# Altium PCB IOT.PcbDoc
Units mil, origin at the board's own origin, x right, y up, seen from the top; angles counter-clockwise.
Board outline 3764.27 x 1643.03 mil, 2 copper layers (Top Layer, Bottom Layer); 29 components, 37 nets, 152 pads, 6 vias.
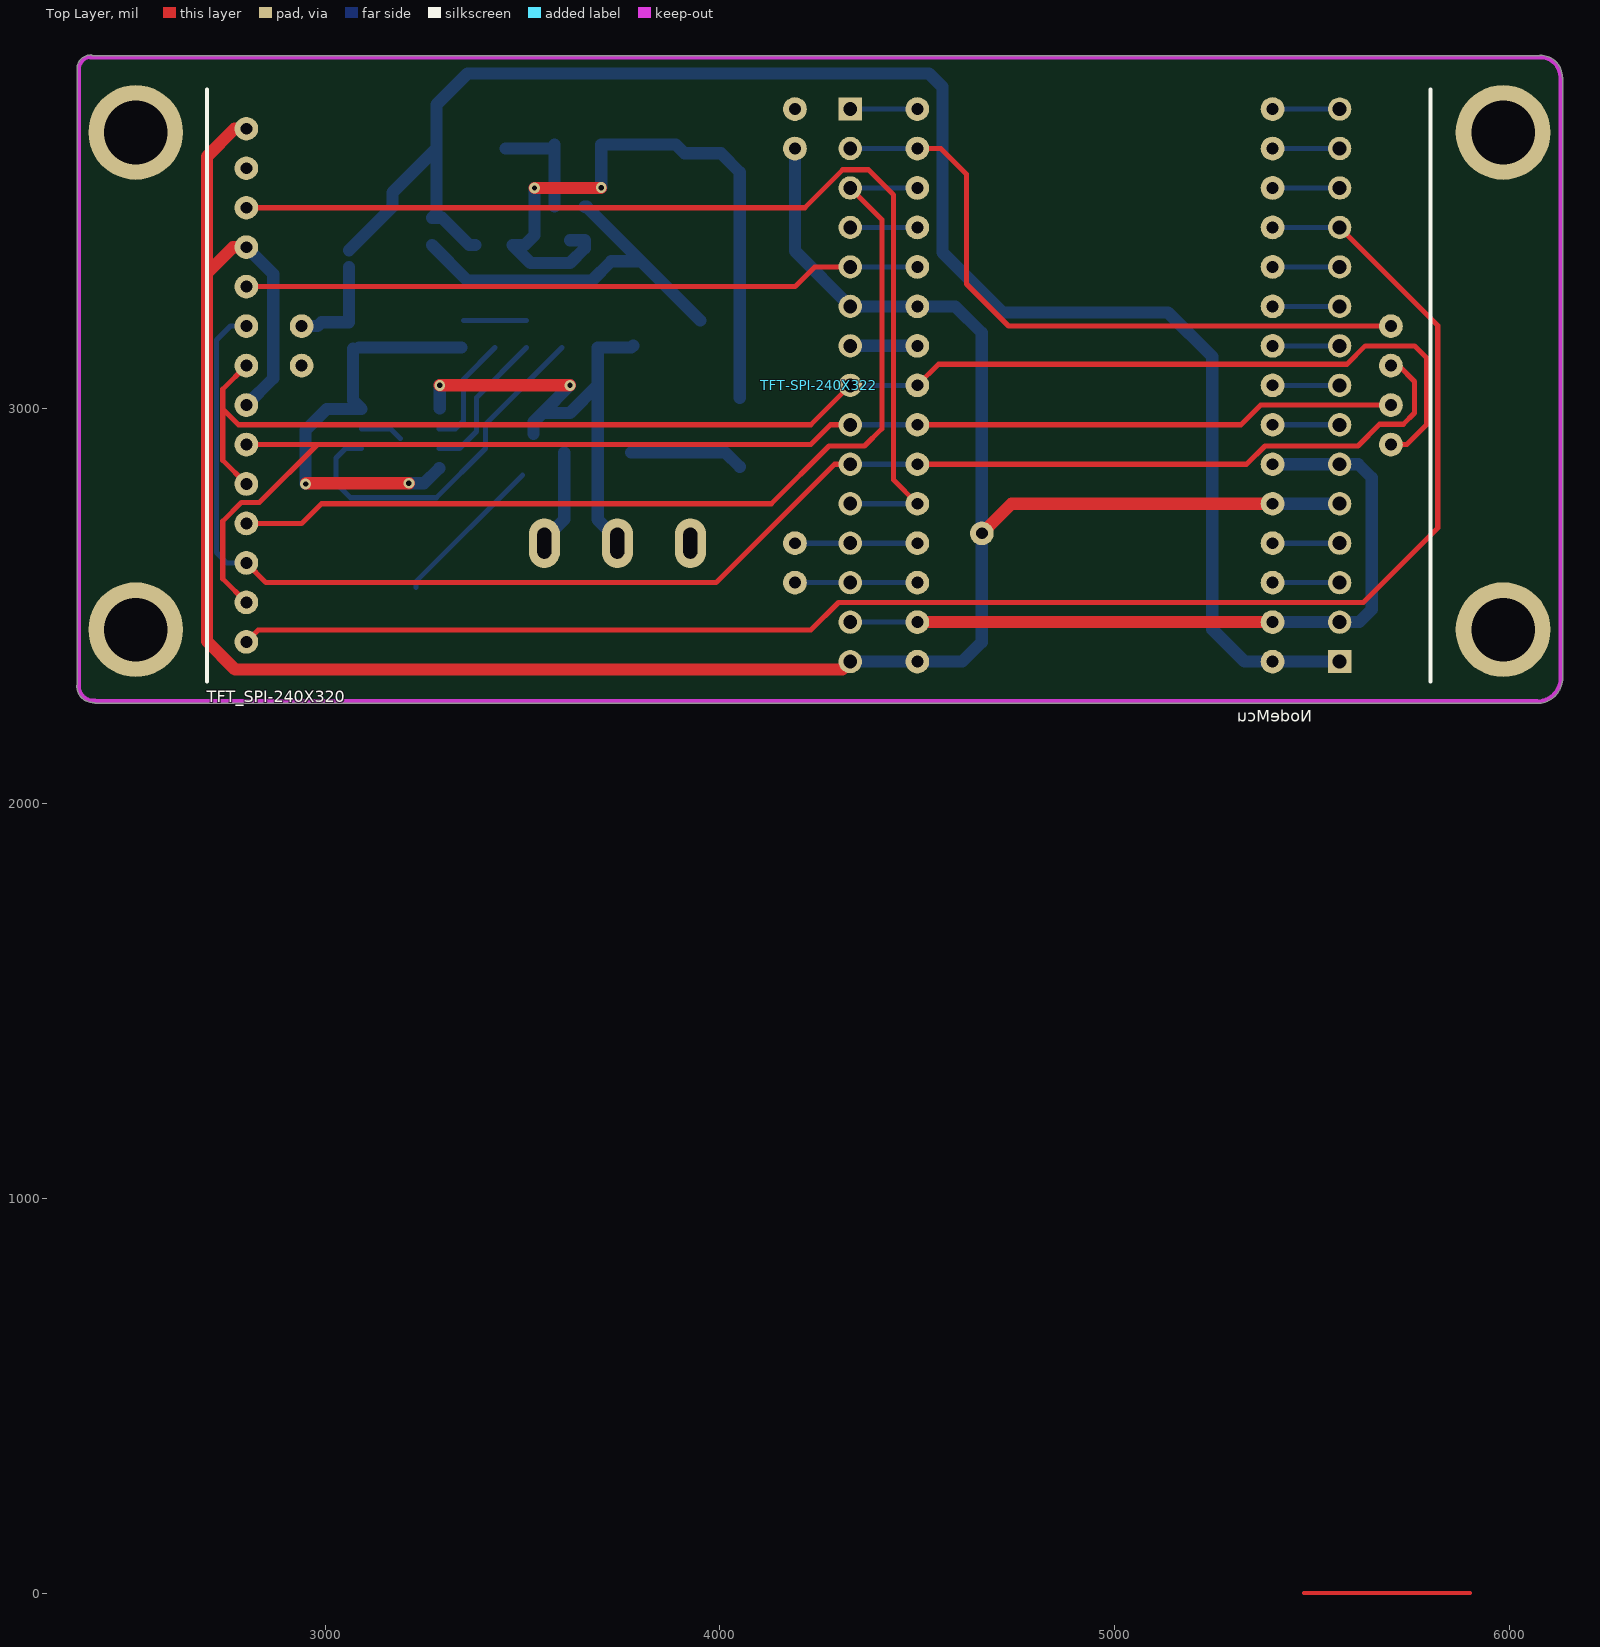
[diagram p0: Top Layer view]
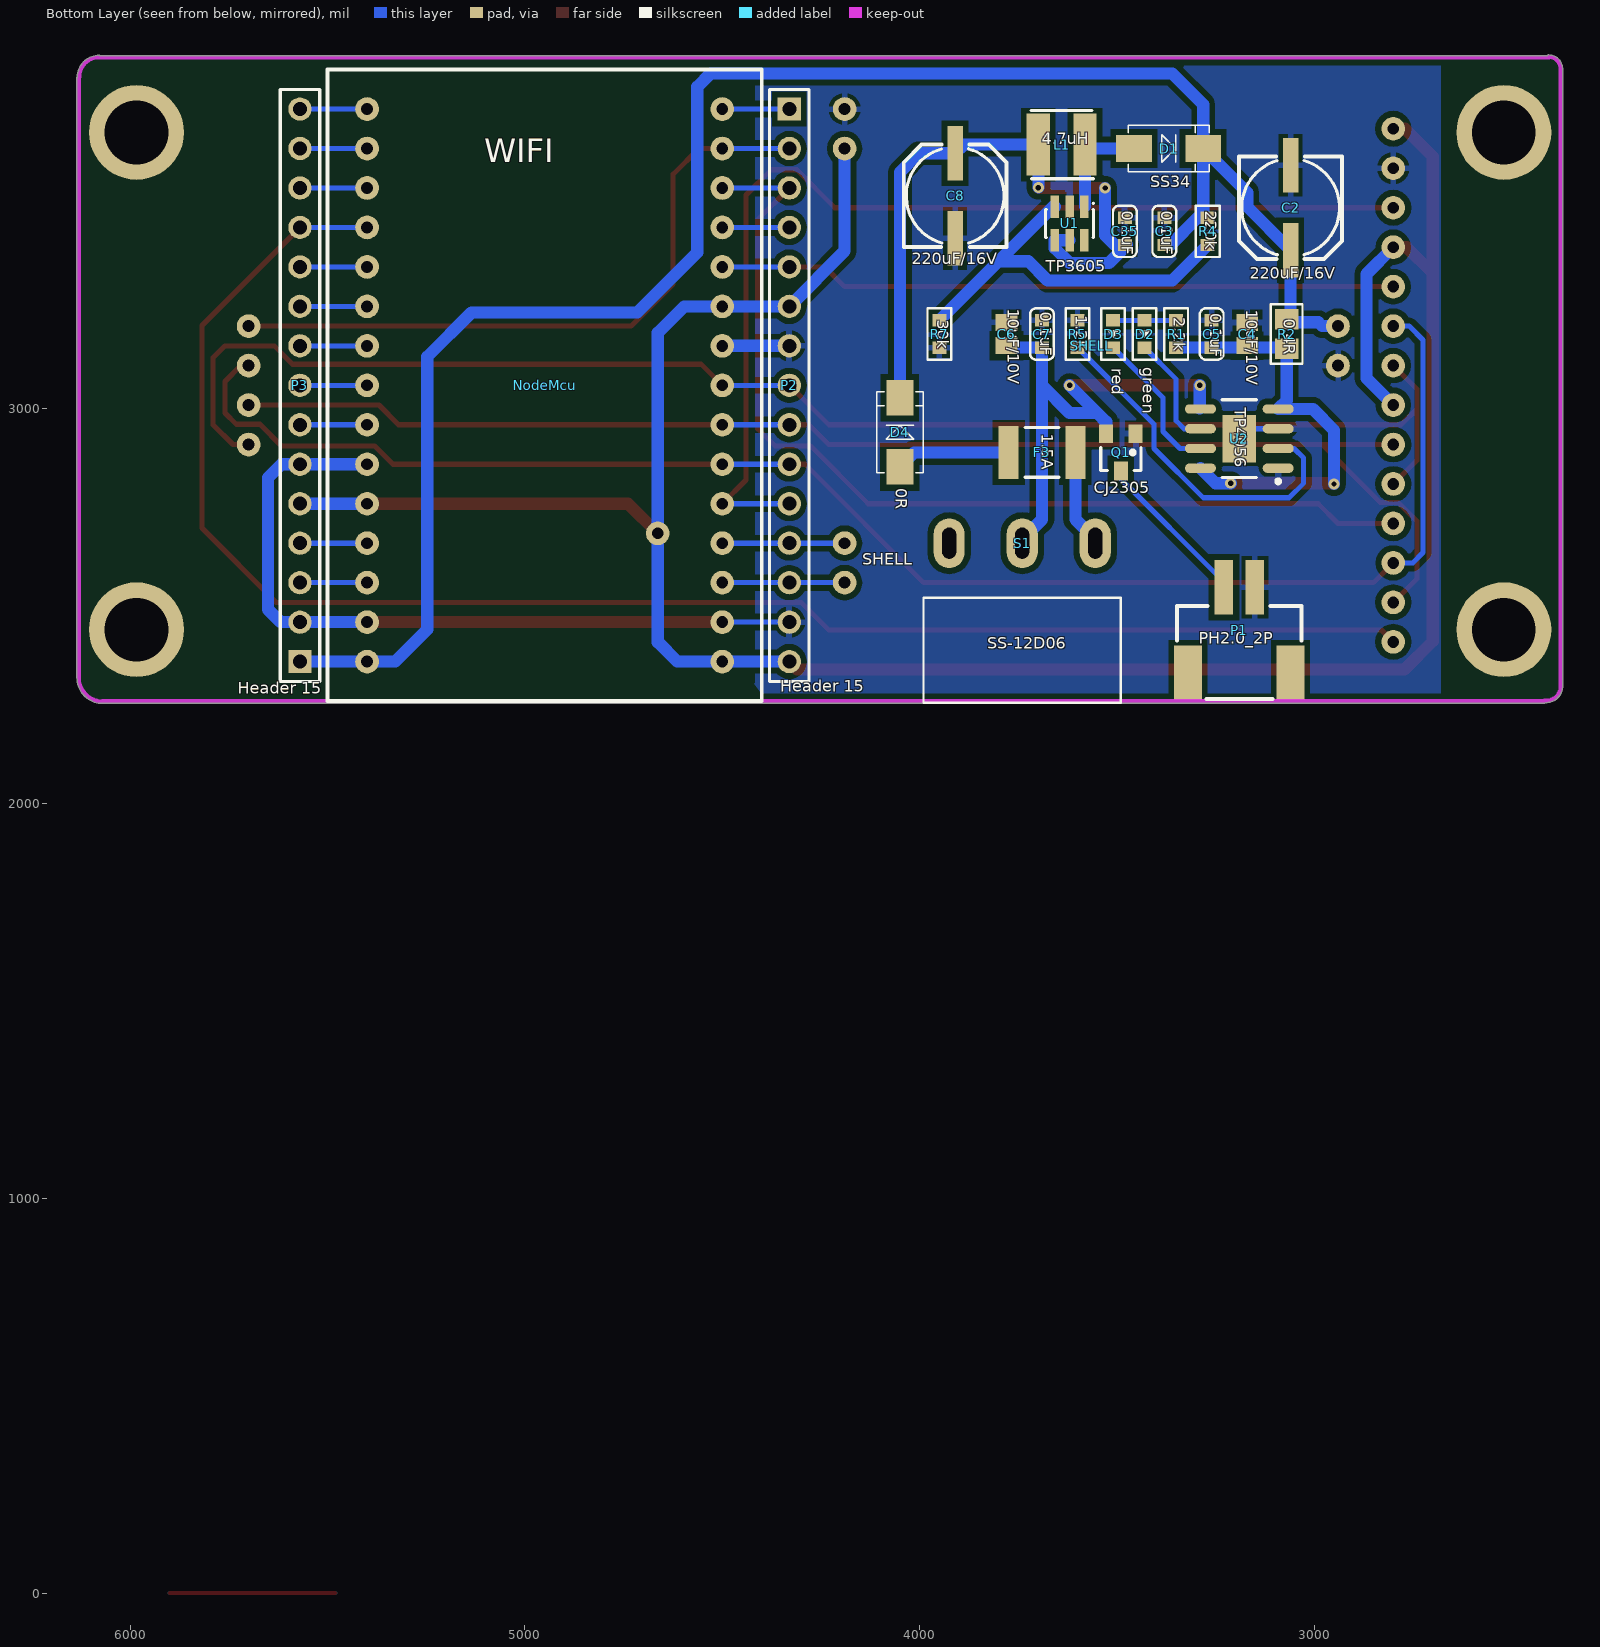
[diagram p1: Bottom Layer view, seen from below]

## Layer stack, top to bottom
Top Layer: signal copper 1.4
Dielectric: dielectric 12.6, FR-4, Dk 4.8
Bottom Layer: signal copper 1.4

## Board outline
2370.99,2302.3 2370.99,3862 cw(c2406,3862) 2406,3897.01 cw(c2406,3892) 2410.01,3895.01 6075.99,3895.01 cw(c6079,3891) 6079,3896.01 cw(c6079,3841) 6134.01,3842.02 cw(c6130,3839) 6135.02,3839 6135.02,2319 cw(c6070,2319) 6070,2253.99 cw(c6070,2259) 6066.99,2254.99 2416.61,2254.99 cw(c2416.61,2260) 2413.53,2256.04 cw(c2412.19,2297.51)

## Design rules (kind name [scope] priority, off if disabled: settings)
Clearance polygon_and_all [InPolygon] p1: gap=15
Clearance [All] p2: gap=10
ComponentClearance [All] p1 off: gap=10 collisioncheckmode=3 verticalgap=10 showdistances=FALSE
HoleSize [All] p1: absolutevalues=TRUE maxlimit=500 minlimit=1 maxpercent=80.000 minpercent=20.000
HoleToHoleClearance [All] p1 off: gap=10 allowstackedmicrovias=TRUE
MinimumSolderMaskSliver [All] p1 off: minsoldermaskwidth=10
PlaneConnect [All] p1: planeconnectstyle=Relief reliefexpansion=20 reliefentries=4 reliefconductorwidth=10 reliefairgap=15
PolygonConnect [All] p1: connectstyle=Relief reliefconductorwidth=15 reliefentries=4 polygonreliefangle="90 Angle" airgapwidth=10
RoutingVias [All] p1: holewidth=28 width=50 viastyle="Through Hole" minholewidth=11.81 minwidth=23.62 maxholewidth=28 maxwidth=50
SilkToSilkClearance [All] p1 off: silktosilkclearance=10
SilkToSolderMaskClearance [IsPad] p1 off: minsilkscreentomaskgap=10 clearancetoexposedcopper=TRUE
SolderMaskExpansion [All] p1: expansion=4
Width [All] p1: maxlimit=40 minlimit=10 preferedwidth=13
21 further rules are at their usual default settings.

## Components (designator, comment, footprint, x,y, rotation, side; value= is the part's Value field where it differs from the comment)
C2 "220uF/16V" SMT-EC-D6.3 3060,3510 r90 bottom
C3 "0.1uF" C0603 3380,3450 r90 bottom
C4 "10uF/10V" C0805 3170,3190 r90 bottom
C5 "0.1uF" C0603 3260,3190 r90 bottom
C6 "10uF/10V" C0805 3780,3190 r90 bottom
C7 "0.1uF" C0603 3690,3190 r90 bottom
C8 "220uF/16V" SMT-EC-D6.3 3910,3540 r270 bottom
C35 "0.1uF" C0603 3480,3450 r90 bottom
D1 "SS34" DO-214 3370,3660 r180 bottom
D2 "green" D0603 3430,3190 r270 bottom
D3 "red" D0603 3510,3190 r270 bottom
D4 "0R" DO-214 4050,2940 r90 bottom
F3 "1.5A" RESC4532AN 3690,2890 r0 bottom
L1 "4.7uH" L4532 3640,3670 r180 bottom
NodeMcu "NodeMcu" NodeMcu 4500,2360 r0 bottom
P1 "PH2.0_2P" CON_PH2.0_2P 3190,2440 r0 bottom
P2 "Header 15" HDR1X15 4330,3760 r270 bottom
P3 "Header 15" HDR1X15 5570,2360 r90 bottom
Q1 "CJ2305" SOT-23-3 3490,2890 r0 bottom
R1 "2.2k" R0603 3350,3190 r270 bottom
R2 "0.4R" R0805 3070,3190 r90 bottom
R4 "220k" R0603 3270,3450 r90 bottom
R5 "1.2K" R0603 3600,3190 r270 bottom
R7 "30k" R0603 3950,3190 r90 bottom
S1 "SS-12D06" SW-SS-12D06 3740,2660 r270 bottom
SHELL "SHELL" SHELL 2940,3160 r0 bottom locked
TFT-SPI-240X322 "TFT_SPI-240X320" TFT-SPI-240X320 2800,3710 r0 top
U1 "TP3605" SOT-23-6 3620,3470 r0 bottom
U2 "TP4056" SOIC127P600-8DN 3190,2925 r0 bottom

## Footprints (in the part's own frame and the unit in brackets; to place one, negate y for a bottom-side part, rotate by r counter-clockwise, add the part's x,y. Pads: shape width x height; smd on the part's side, far side on the other; paste and mask are expansions set on the pad)
C0603 [mm]
  rect 0.8x0.9 smd: 1(-0.875,0) 2(0.875,0)
  silkscreen extent -1.65,-0.76 1.65,0.76, body extent -0.71,-0.43 0.81,0.33, height 0.81
C0805 [mm] "Chip Capacitor, Body 2.0x1.3mm, IPC High Density"
  rect 1.1x1.4 smd: 1(-0.75,0) 2(0.75,0)
  body extent -1.1,-0.72 1.1,0.72, height 1.4
CON_PH2.0_2P [mm]
  rect 1.8x3.5 smd: 0(-3.3,2.747) 0(3.3,2.747)
  rect 1.2x3.5 smd: 1(-1,-2.747) 2(1,-2.747)
  silkscreen extent -4,-1.55 4,4.45, body extent -3.9,-4.1 4,4.1, height 5.61
D0603 [mm]
  rect 0.8x0.9 smd: 1(-0.875,0) 2(0.875,0)
  silkscreen extent -1.65,-0.76 1.65,0.76, body extent -0.8,-0.37 0.85,0.36, height 0.68
DO-214 [mm]
  rect 2.3x1.75 smd: 1(-2.197,0) 2(2.248,0)
  silkscreen extent -2.58,-1.5 2.63,1.5, body extent -2.27,-1.35 2.33,1.35, height 2.4
HDR1X15 [mm] "Connector; Header; 15 Position"
  rect 1.5x1.5 hole 0.9: 1(0,0)
  round 1.5 hole 0.9: 2(2.54,0) 3(5.08,0) 4(7.62,0) 5(10.16,0) 6(12.7,0) 7(15.24,0) 8(17.78,0) 9(20.32,0) 10(22.86,0) 11(25.4,0) 12(27.94,0) 13(30.48,0) 14(33.02,0) 15(35.56,0)
  silkscreen extent -1.27,-1.27 36.83,1.27
L4532 [mm]
  rect 1.5x4 smd: 1(-1.5,0) 2(1.5,0)
  silkscreen extent -1.98,-2.2 2.06,2.2
NodeMcu [mil] "5v"
  round 60 hole 30: 1(900,0) 2(900,-100) 3(900,-200) 4(900,-300) 5(900,-400) 6(900,-500) 7(900,-600) 8(900,-700) 9(900,-800) 10(900,-900) 11(900,-1000) 12(900,-1100) 13(900,-1200) 14(900,-1300) 15(900,-1400) 16(0,0) 17(0,-100) 18(0,-200) 19(0,-300) 20(0,-400) 21(0,-500) 22(0,-600) 23(0,-700) 24(0,-800) 25(0,-900) 26(0,-1000) 27(0,-1100) 28(0,-1200) 29(0,-1300) 30(0,-1400)
  silkscreen extent -100,-1500 1000,100
R0603 [mm]
  rect 0.8x0.9 smd: 1(-0.875,0) 2(0.875,0)
  silkscreen extent -1.65,-0.76 1.65,0.76, body extent -0.8,-0.4 0.8,0.4, height 0.45
R0805 [mm]
  rect 1.3x1.5 smd: 1(-0.95,0) 2(0.95,0)
  silkscreen extent -1.91,-1.02 1.91,1.02, body extent -1,-0.63 1,0.63, height 0.55
RESC4532AN [mm]
  rect 1.3x3.4 smd: 1(-2.15,0) 2(2.15,0)
  silkscreen extent -1.1,-1.6 1.1,1.6, body extent -2.4,-1.7 2.4,1.7, height 0.7
SHELL [mil]
  round 60 hole 30: 1(0,50) 2(0,-50) 3(1250,600) 4(1250,500) 5(1250,-500)
  round 60 hole 30 mask+4: 6(1250,-600)
SMT-EC-D6.3 [mm]
  rect 3.5x1 smd: 1(-2.737,0) 2(2.737,0)
  silkscreen extent -3.3,-3.31 3.3,3.31
SOIC127P600-8DN [mm] "8-Pin Small Outline Integrated Circuit 1.27 mm Pitch"
  oval 2x0.6 smd: 1(-2.5,1.905) 2(-2.5,0.635) 3(-2.5,-0.635) 4(-2.5,-1.905) 5(2.5,-1.905) 6(2.5,-0.635) 7(2.5,0.635) 8(2.5,1.905)
  rect 2.15x3.05 smd: 9(0,0)
  silkscreen extent -2.62,-2.5 1.1,2.88, body extent -2,-2.5 2,2.5, height 1.55
SOT-23-3 [mm]
  rect 0.9x1.2 smd: 1(-0.95,-1.2) 2(0.95,-1.2) 3(0,1.2)
  silkscreen extent -1.3,-0.3 1.3,1.18, body extent -1.48,-1.37 1.52,1.27, height 1.08
SOT-23-6 [mm]
  rect 0.55x1.45 smd: 1(-0.95,-1.075) 2(0,-1.075) 3(0.95,-1.075) 4(0.95,1.075) 5(0,1.075) 6(-0.95,1.075)
  silkscreen extent -1.57,-1.35 1.55,0.9, body extent -1.5,-1.47 1.5,1.53, height 1.3
SW-SS-12D06 [mm]
  oval 3.2x2 hole 0.9 slot 2 at 0 deg: 1(0,4.7) 2(0,0) 3(0,-4.7)
  silkscreen extent 3.5,-6.35 10.26,6.35, body extent -0.35,-6.23 13.95,6.77, height 7.01
TFT-SPI-240X320 [mil]
  round 60 hole 30: 1(0,-1300) 2(0,-1200) 3(0,-1100) 4(0,-1000) 5(0,-900) 6(0,-800) 7(0,-700) 8(0,-600) 9(0,-500) 10(0,-400) 11(0,-300) 12(0,-200) 13(0,-100) 14(0,0) 15(2900,-500) 16(2900,-600) 17(2900,-700) 18(2900,-800)
  silkscreen extent -100,-1400 3000,100

## Part data
C2 C8: library part "Cap Pol1", "贴片电解电容 6.3X7.7"
C3 C5 C7 C35: library part Cap, "Capacitor 0603 10% 50V"
C4 C6: library part "Cap Pol1", "Capacitor 0805 10% 10V"
D1: library part Diode, "Diode DO214-AC"
D2 D3: library part LED3, "LED, Red 0603 (1608)"
D4: library part Diode, "0R 1% 1206"
F3: library part "Fuse 2", "自恢复保险丝 25V 1812"
L1: library part Inductor, "GDCD4532-4R7MT"
P1: library part "Header 2"
P2 P3: "Header, 15-Pin"
Q1: library part PMOS, "PMOS CJ2305 SOT-23"
R1 R4 R5 R7: library part Res2, "Resistor,  1% 0603 (1608)"
R2: library part Res2, "Resistor,  1% 0805"
S1: library part SW-SPDT, "二档大拨动开关弯角拨动开关SS-12D06"
U1: library part MP1540DJ, "电源 升压 IC"
U2: "锂电池充电IC"

## Free pads (board coordinates)
  round 60 hole 30: 0(4663.6,2685)
  round 240.16 hole 161.42: 1(5984.25,3700.79) 2(5984.25,2440.94) 3(2519.68,2440.94) 4(2519.68,3700.79)

## Via types
v1: diameter 27.56, hole 13.78, Top Layer to Bottom Layer, 6 vias

## Nets (pads, with @x,y where several pads share a name; then routed paths per layer and width w, separated by ;. In a path a pad name is that pad's centre, name@x,y a point inside that pad or via, vN(x,y) a via of type N, cw(c..) or ccw(c..) an arc to the next point about the centre after c; other vN are vias at no path point)
3V3: NodeMcu.5 NodeMcu.16 NodeMcu.25 P2.6 P2.15 P3.5 pad.0 SHELL.5 TFT-SPI-240X322.7 TFT-SPI-240X322.11 TFT-SPI-240X322.14 | length 6502.8
  Top Layer w13: TFT-SPI-240X322.14@2770,3710 TFT-SPI-240X322.14
  Top Layer w31: TFT-SPI-240X322.14@2770,3710 2700,3640 2700,3344 ; TFT-SPI-240X322.11 2766,3410 2700,3344 ; P2.15 4310,2340 2771.5,2340 2700,2411.5 2700,3344 ; pad.0 4738.6,2760 NodeMcu.5
  Bottom Layer w31: TFT-SPI-240X322.7 2868,3078 2868,3342 TFT-SPI-240X322.11 ; SHELL.5 4190,3400 P2.6 NodeMcu.25 4596.2,3260 4663.2,3193 4663.2,2409.3 4613.9,2360 NodeMcu.16 P2.15 ; NodeMcu.5 P3.5
5V: C2.1 C3.1 D1.2 NodeMcu.1 P3.1 R2.2 R4.2 SHELL.2 | length 4632.8
  Bottom Layer w31: SHELL.2 2980,3210 2990,3220 3060,3220 C2.1@3060,3360 ; C2.1 3170,3512.23 3170,3548.5 D1.2 ; C3.1 3364.43,3415.55 3295.54,3484.45 R4.2 3281.5,3495.95 D1.2 ; P3.1 NodeMcu.1 5328.8,2360 5247.5,2441.3 5247.5,3132.2 5135.4,3244.3 4715.6,3244.3 4563.5,3396.4 4563.5,3816.2 4529.7,3850 3360,3850 3281.5,3771.5 D1.2
BAT: C6.1 C7.1 Q1.2 S1.2 U2.5 | length 1316.8
  Top Layer w31: v1(3290,3060) v1(3620,3060)
  Bottom Layer w31: U2.5@3290,3001.57 v1(3290,3060) ; Q1.2 3527.4,2967.4 3550,2990 ; v1(3620,3060) 3550,2990 ; S1.2@3740,2670 3690,2720 3690,3060 ; C6.1 3775.08,3155.55 C7.1 3690,3060 ; 3550,2990 3620,2990 3690,3060
DC: NodeMcu.26 P2.5 TFT-SPI-240X322.10 | length 1720.7
  Top Layer w13: TFT-SPI-240X322.10 4190,3310 4240,3360 P2.5
  Bottom Layer w13: P2.5 NodeMcu.26
FB: R4.1 R7.2 U1.3 | length 999.2
  Bottom Layer w31: R4.1 3359.75,3325.8 3675.8,3325.8 3724.45,3374.45 3800,3374.45 ; U1.3 3662.13,3512.32 3800,3374.45 ; R7.2 3800,3374.45
GND: C2.2 C3.2 C4.2 C5.2 C6.2 C7.2 C8.2 C35.2 NodeMcu.2 NodeMcu.6 NodeMcu.17 NodeMcu.24 P1.1 P2.7 P2.14 P3.2 P3.6 Q1.1 R5.1 R7.1 SHELL.1 SHELL.6 TFT-SPI-240X322.13 U1.2 U2.1 U2.3 U2.9 | length 2212.7
  Top Layer w31: NodeMcu.17 NodeMcu.2
  Bottom Layer w13: U2.3 3165,2950 U2.9 ; P2.14 NodeMcu.17
  Bottom Layer w31: P2.7 NodeMcu.24 ; NodeMcu.2 P3.2 5619.6,2460 5651.3,2491.7 5651.3,2825.6 5616.9,2860 P3.6 NodeMcu.6
HCLK: NodeMcu.23 P2.8 TFT-SPI-240X322.5 TFT-SPI-240X322.8 TFT-SPI-240X322.18 | length 3792.3
  Top Layer w13: TFT-SPI-240X322.5 2740,2870 2740,3000 ; TFT-SPI-240X322.8 2740,3050 2740,3000 ; P2.8 4230,2960 2780,2960 2740,3000 ; NodeMcu.23 4553.5,3113.5 5588.59,3113.5 5635.09,3160 5760,3160 5790,3130 5790,2960 5740,2910 TFT-SPI-240X322.18
  Bottom Layer w13: P2.8 NodeMcu.23
HCS: NodeMcu.20 P2.11 TFT-SPI-240X322.12 | length 2683.2
  Top Layer w13: TFT-SPI-240X322.12 4214.91,3510 4310.93,3606.03 4376.03,3606.03 4440,3542.06 4440,2820 NodeMcu.20
  Bottom Layer w13: P2.11 NodeMcu.20
HMISO: NodeMcu.22 P2.9 TFT-SPI-240X322.2 TFT-SPI-240X322.6 TFT-SPI-240X322.17 | length 3492.5
  Top Layer w13: TFT-SPI-240X322.2 2740,2570 2740,2715.76 2787.74,2763.5 2833.5,2763.5 2980,2910 ; TFT-SPI-240X322.6 2980,2910 ; P2.9 4280,2960 4230,2910 2980,2910 ; NodeMcu.22 5320,2960 5370,3010 TFT-SPI-240X322.17
  Bottom Layer w13: P2.9 NodeMcu.22
HMOSI: NodeMcu.21 P2.10 TFT-SPI-240X322.3 TFT-SPI-240X322.9 TFT-SPI-240X322.16 | length 4030.8
  Top Layer w13: TFT-SPI-240X322.3 2850,2560 3990,2560 4290,2860 P2.10 ; NodeMcu.21 5334.24,2860 5380.74,2906.5 5616.5,2906.5 5671.26,2961.26 5731.26,2961.26 5760,2990 5760,3070 5720,3110 TFT-SPI-240X322.16
  Bottom Layer w13: TFT-SPI-240X322.3 2750.5,2610 2724.3,2636.2 2724.3,3174.7 2759.6,3210 TFT-SPI-240X322.9 ; P2.10 NodeMcu.21
NetC4_1: C4.1 C5.1 R1.2 R2.1 U2.4 U2.8 | length 1073.6
  Top Layer w31: v1@2951.85,2811.85 v1(3211.85,2811.85)
  Bottom Layer w31: v1(2950,2810) 2950,2946.4 3003.6,3000 U2.4 3070,3021.57 R2.1 ; R2.1@3085.55,3155.55 C5.1 R1.2@3345.08,3155.55 ; v1(3211.85,2811.85) 3250.28,2811.85 U2.8
NetC8_1: C8.1 C35.1 D4.2 L1.1 U1.4 U1.5 | length 1683.7
  Top Layer w31: v1(3530,3560) v1@3698.11,3560
  Bottom Layer w31: C35.1@3474.45,3415.55 3520,3370 3620,3370 3657.4,3407.4 U1.4 U1.5 ; C35.1 3505.55,3415.55 3530,3440 v1(3530,3560) ; v1(3699.06,3560.94) L1.1 3887.77,3670 C8.1 4002.23,3647.77 4050,3600 D4.2
NetD1_1: D1.1 L1.2 U1.1 | length 272.8
  Bottom Layer w13: U1.1@3580.94,3513.98 U1.1
  Bottom Layer w31: D1.1 L1.2@3570.94,3660 ; U1.1@3580.94,3513.98 L1.2
NetD2_1: D2.1 D3.1 R1.1 | length 160
  Bottom Layer w13: R1.1 D2.1 D3.1
NetD2_2: D2.2 U2.6 | length 288.5
  Bottom Layer w13: U2.6 3330,2950 3350,2970 3350,3075.55 D2.2
NetD3_2: D3.2 U2.7 | length 377.5
  Bottom Layer w13: U2.7 3340,2900 3383,2943 3383,3028.55 D3.2
NetD4_1: D4.1 F3.2 | length 290.5
  Bottom Layer w31: F3.2 4013.5,2890 D4.1
NetF3_1: F3.1 S1.1 | length 240.9
  Bottom Layer w31: S1.1@3554.96,2670 3605.35,2720.39 F3.1
NetNodeMcu_3: NodeMcu.3 P3.3 | length 170
  Bottom Layer w13: NodeMcu.3 P3.3
NetNodeMcu_4: NodeMcu.4 P3.4 | length 170
  Bottom Layer w13: NodeMcu.4 P3.4
NetNodeMcu_7: NodeMcu.7 P3.7 | length 170
  Bottom Layer w13: NodeMcu.7 P3.7
NetNodeMcu_8: NodeMcu.8 P3.8 | length 170
  Bottom Layer w13: NodeMcu.8 P3.8
NetNodeMcu_9: NodeMcu.9 P3.9 | length 170
  Bottom Layer w13: NodeMcu.9 P3.9
NetNodeMcu_10: NodeMcu.10 P3.10 | length 170
  Bottom Layer w13: NodeMcu.10 P3.10
NetNodeMcu_11: NodeMcu.11 P3.11 | length 170
  Bottom Layer w13: NodeMcu.11 P3.11
NetNodeMcu_13: NodeMcu.13 P3.13 | length 170
  Bottom Layer w13: NodeMcu.13 P3.13
NetNodeMcu_14: NodeMcu.14 P3.14 | length 170
  Bottom Layer w13: NodeMcu.14 P3.14
NetNodeMcu_15: NodeMcu.15 P3.15 | length 170
  Bottom Layer w13: NodeMcu.15 P3.15
NetNodeMcu_27: NodeMcu.27 P2.4 | length 170
  Bottom Layer w13: P2.4 NodeMcu.27
NetNodeMcu_30: NodeMcu.30 P2.1 | length 170
  Bottom Layer w13: P2.1 NodeMcu.30
NetP1_2: P1.2 Q1.3 | length 396.7
  Bottom Layer w13: P1.2 3229.37,2562.13 Q1.3@3500,2832.76
NetR5_2: R5.2 U2.2 | length 920.3
  Bottom Layer w13: U2.2 3051.4,2900 3026.9,2875.5 3026.9,2812.1 3063.9,2775.1 3281.12,2775.1 3406,2899.98 3406,2961.55 R5.2
RX: NodeMcu.19 P2.12 SHELL.4 | length 310
  Bottom Layer w13: SHELL.4 P2.12 NodeMcu.19
SD-CS: NodeMcu.29 P2.2 TFT-SPI-240X322.15 | length 1719.5
  Top Layer w13: NodeMcu.29 4559.3,3660 4624.4,3594.9 4624.4,3316.5 4730.9,3210 TFT-SPI-240X322.15
  Bottom Layer w13: P2.2 NodeMcu.29
T-CS: NodeMcu.28 P2.3 TFT-SPI-240X322.4 | length 2522.5
  Top Layer w13: TFT-SPI-240X322.4 2940,2710 2990,2760 4130,2760 4276.03,2906.03 4366.03,2906.03 4410,2950 4410,3480 P2.3
  Bottom Layer w13: P2.3 NodeMcu.28
T-IRQ: NodeMcu.12 P3.12 TFT-SPI-240X322.1 | length 4172.4
  Top Layer w13: TFT-SPI-240X322.1 2830,2440 4230,2440 4300,2510 5630,2510 5818.5,2698.5 5818.5,3211.5 P3.12
  Bottom Layer w13: NodeMcu.12 P3.12
TX: NodeMcu.18 P2.13 SHELL.3 | length 310
  Bottom Layer w13: SHELL.3 P2.13 NodeMcu.18
pads on no net: P1.0 S1.3 U1.6
copper on no net: | length 420
  Top Layer w10: 5480,0 5900,0

## Polygon pours and split planes (outlines as drawn)
GND on Bottom Layer "Bottom Layer-No Net" (solid, remove dead copper, pour order 3): 4421.2,2300.37 4416.66,2306.08 4416.66,3959.1 2707.53,3959.1 2680,3924.47 2680,2288.86 2680,2265.74 2712.15,2225.3 2730.53,2248.42 4384.44,2248.42 4384.44,2259.93 4421.2,2306.18

## Keep-outs
Keep-Out Layer:
  lines w10: 2405,3890 6081,3890 ; 2406,3892 ccw(c2406,3862) 2376,3862 2376,2302 ccw(c2412.19,2297.51) 2416.61,2261.3 ; 2416.61,2260 6070,2260 ; 6070,2259 ccw(c6070,2319) 6130,2319 6130,3839 ; 6079,3891 cw(c6079,3841) 6129,3841

## Silkscreen, mask and mechanical layers (free items; w line width, h text height)
Bottom Overlay:
  text "WIFI" at 5103,3625.2 h60